# EAGLE board msi0010_new (EAGLE 6.1), part 1 of 2
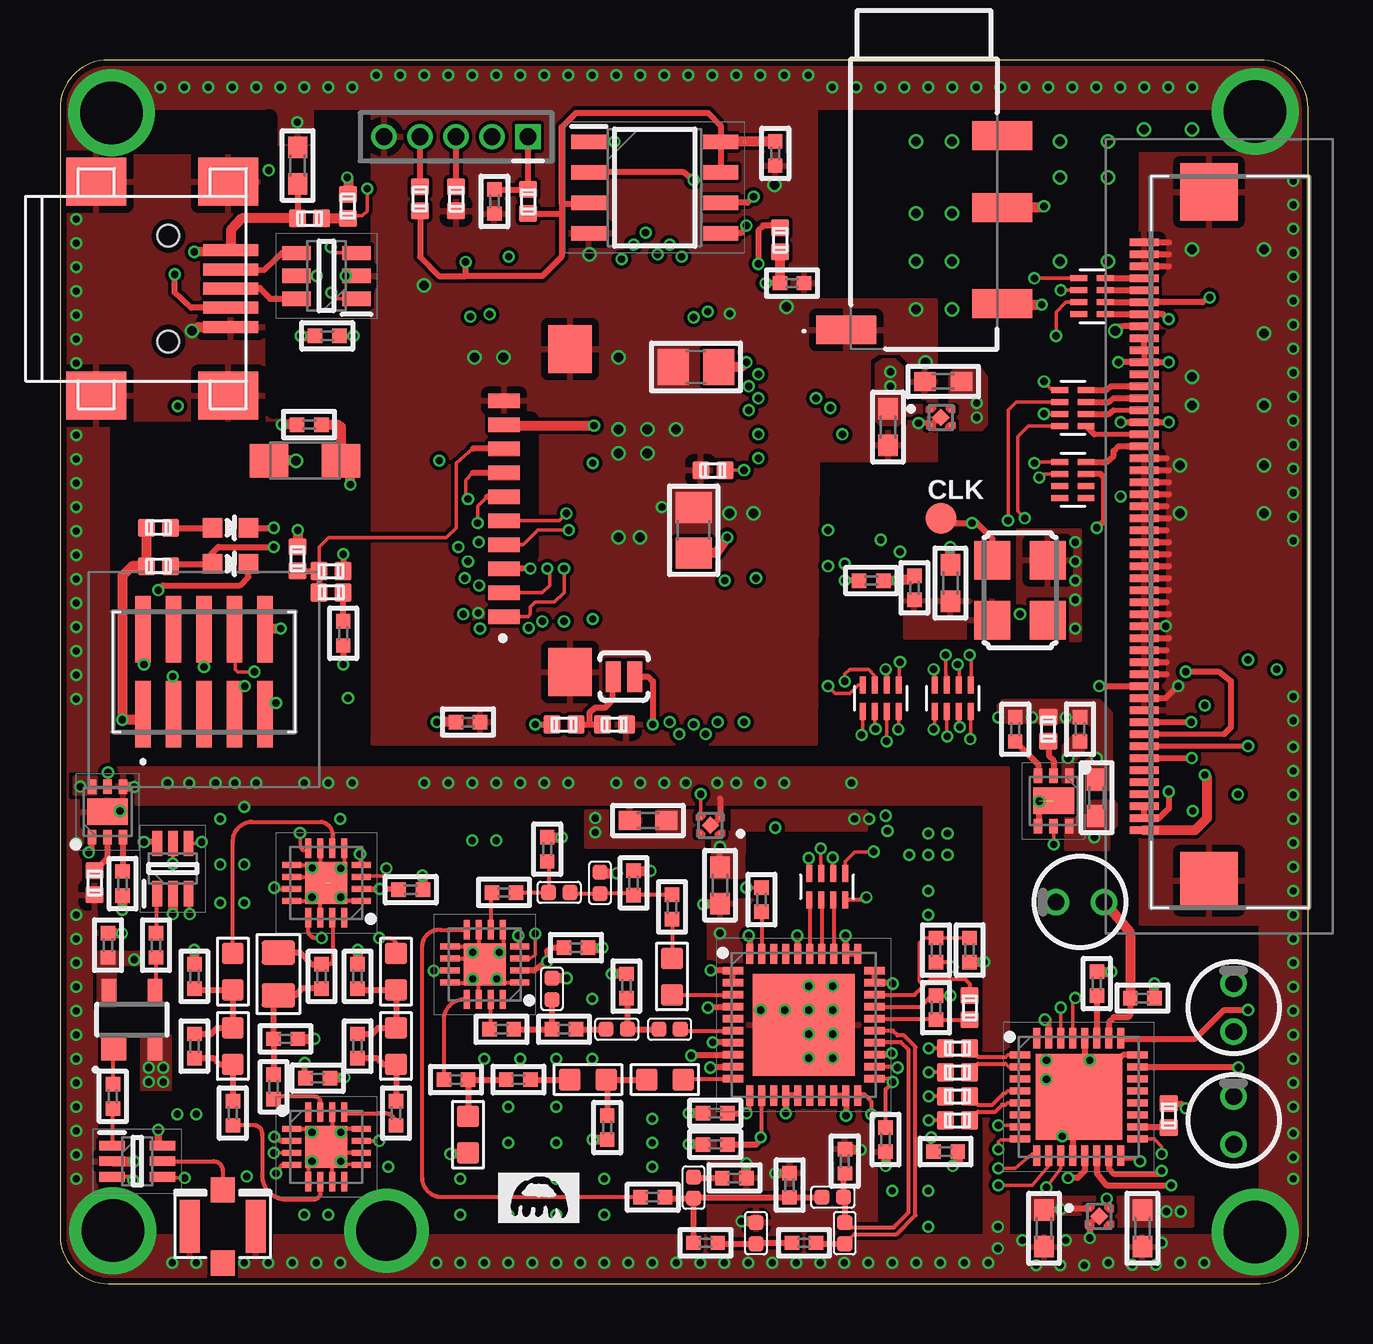
[diagram p0: board, top side]
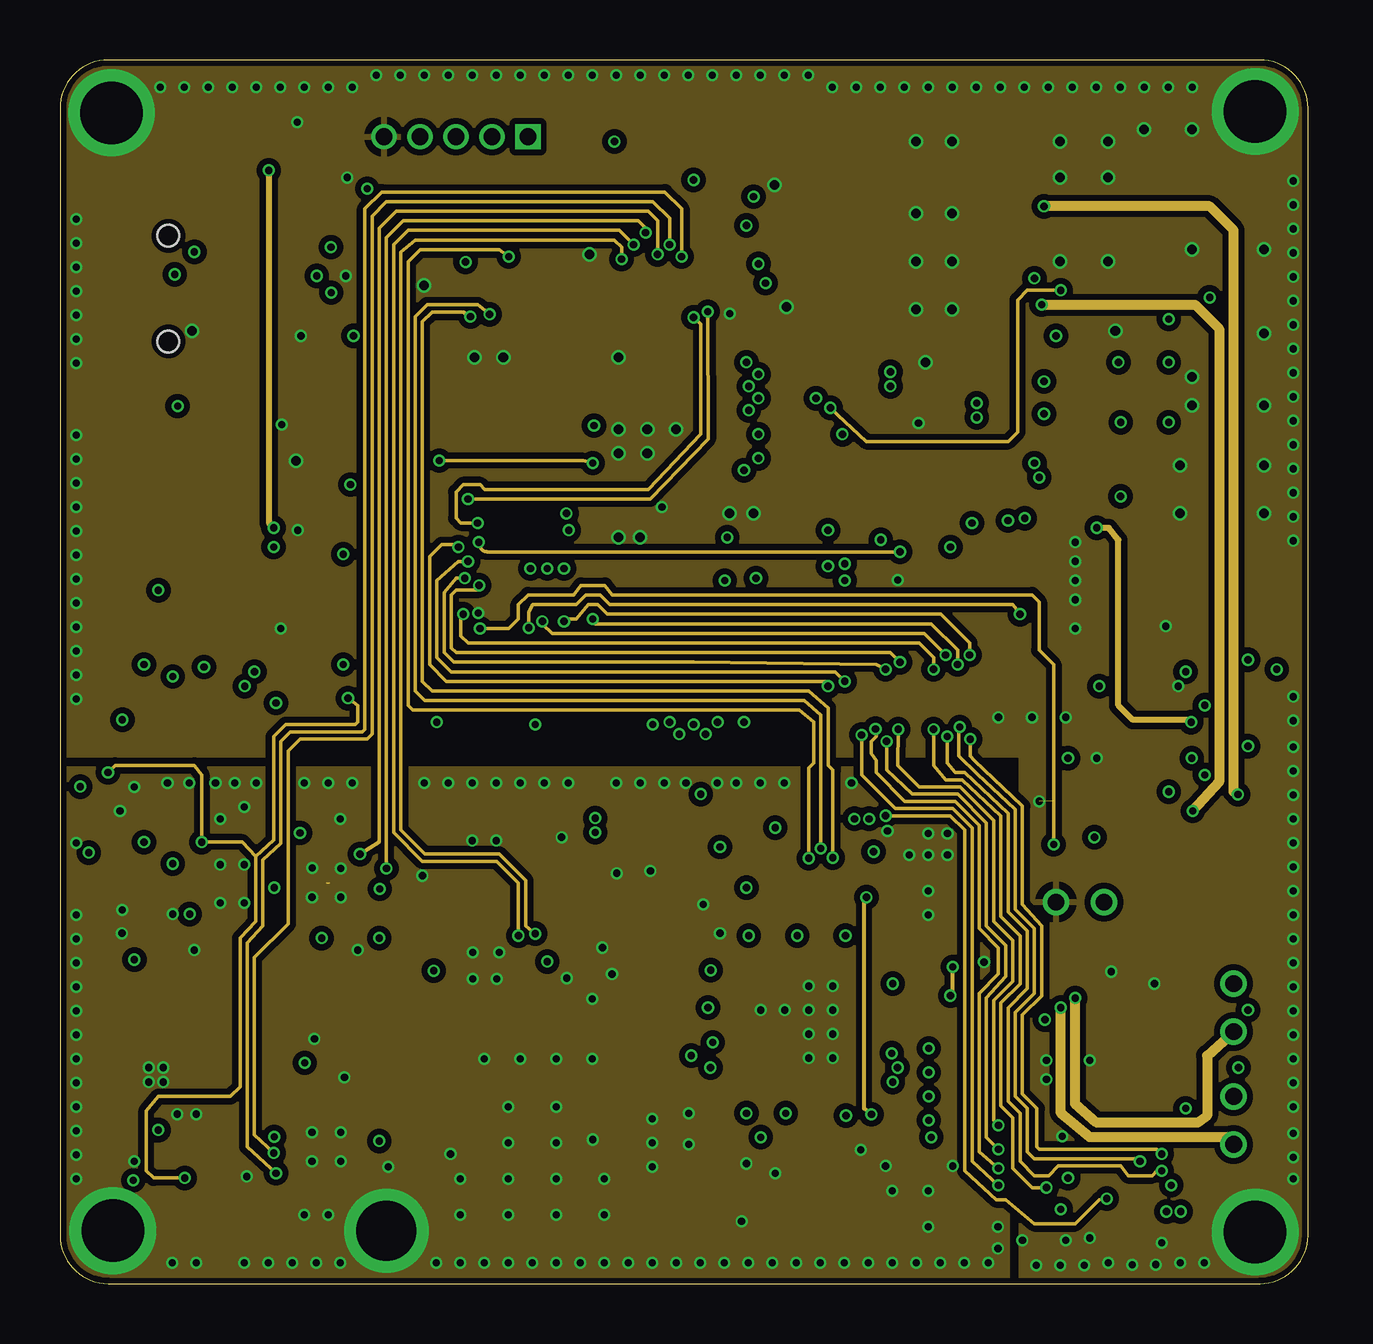
[diagram p1: board, inner layer Route2]
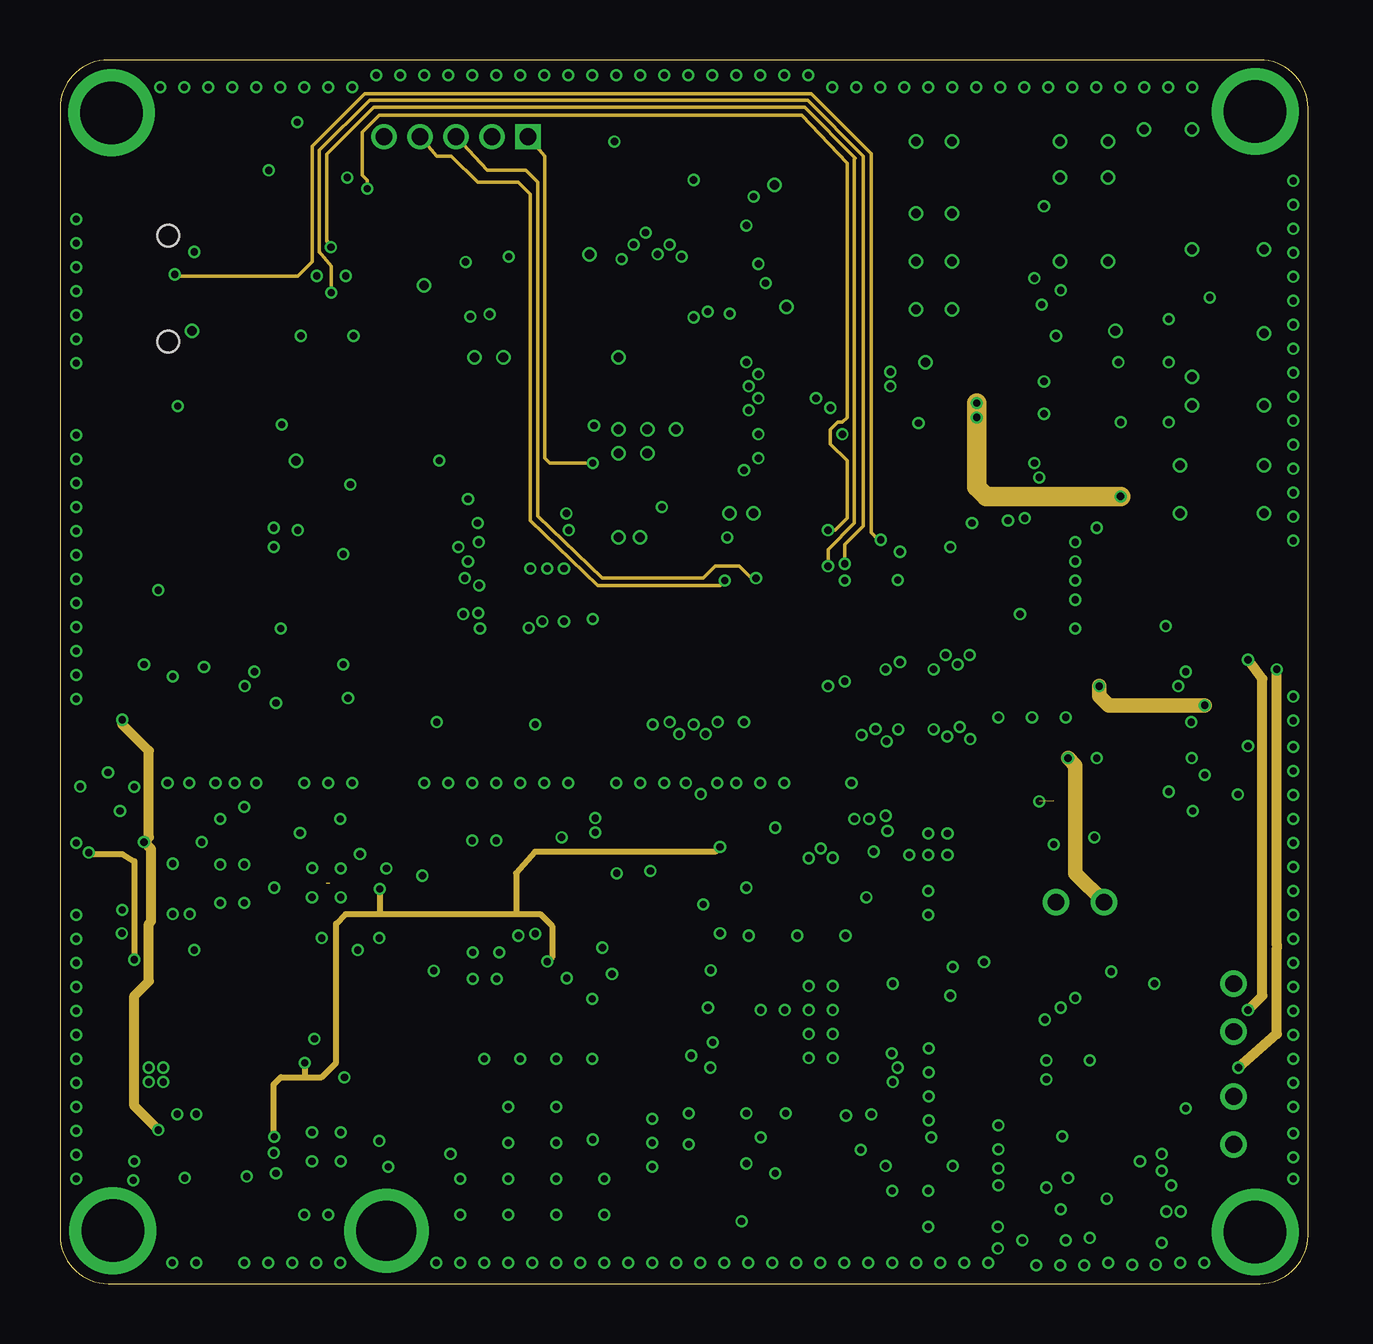
[diagram p2: board, inner layer Route3]
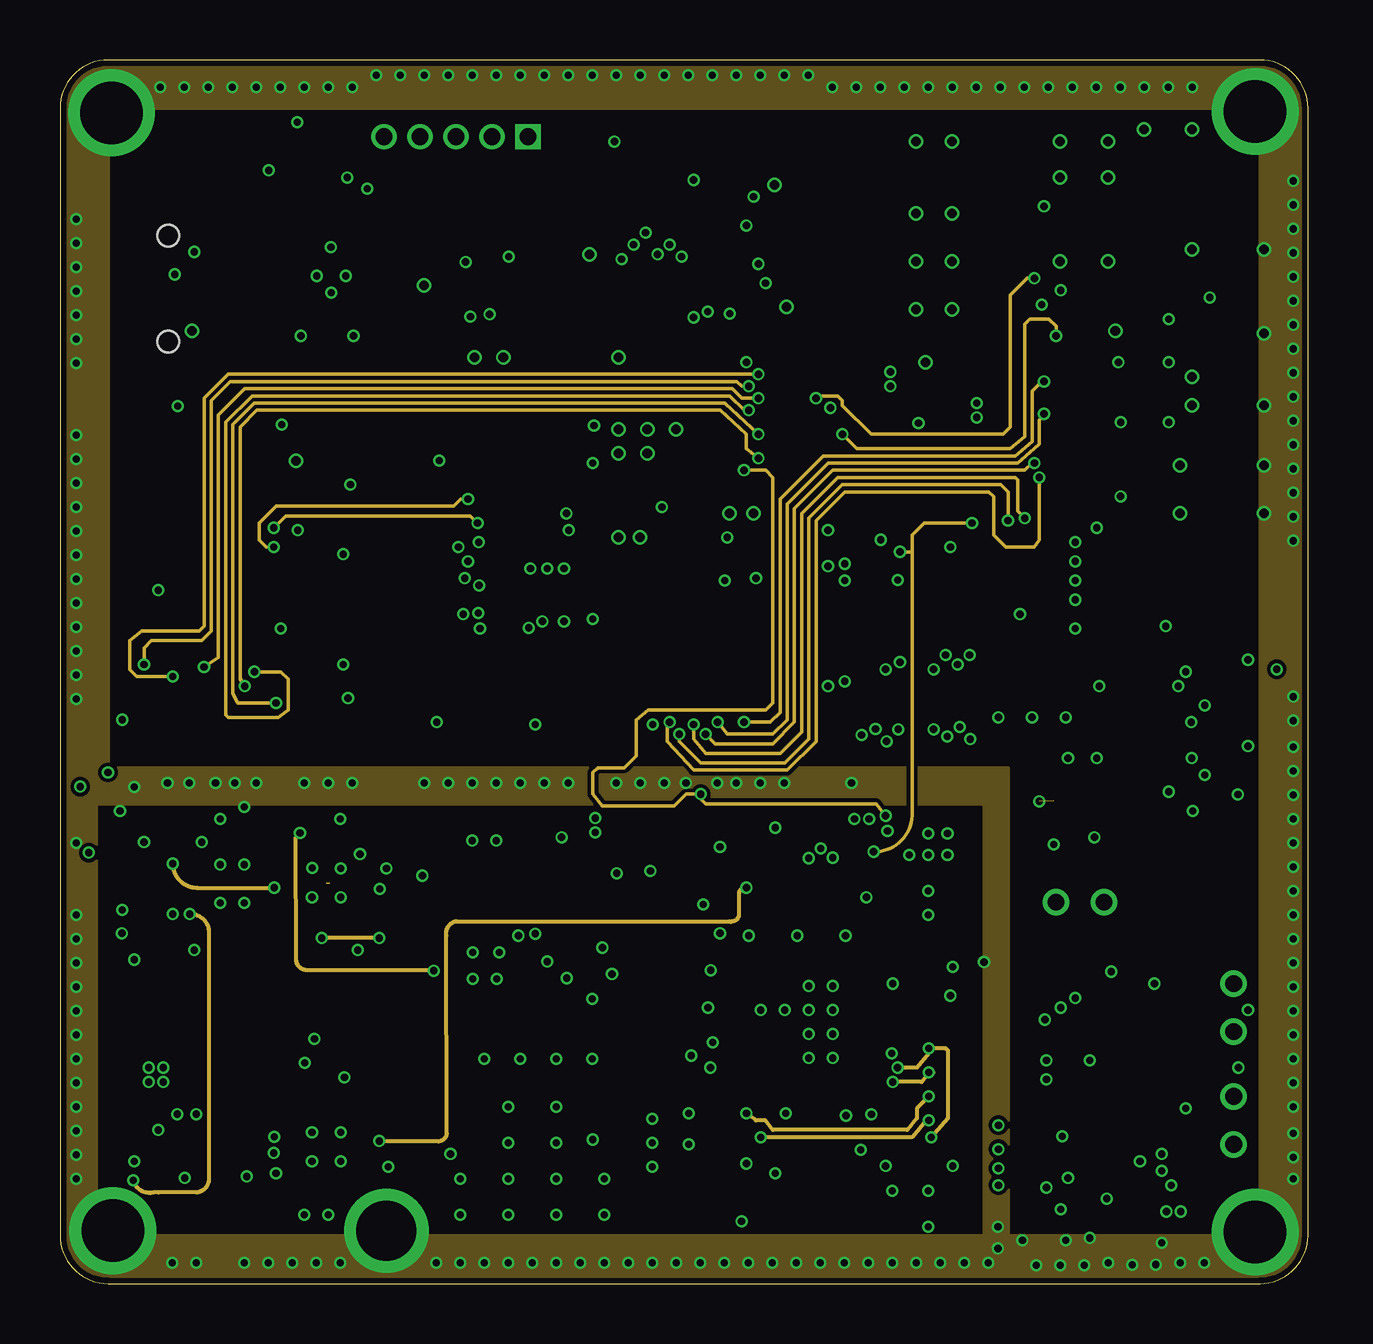
[diagram p3: board, inner layer Route14]
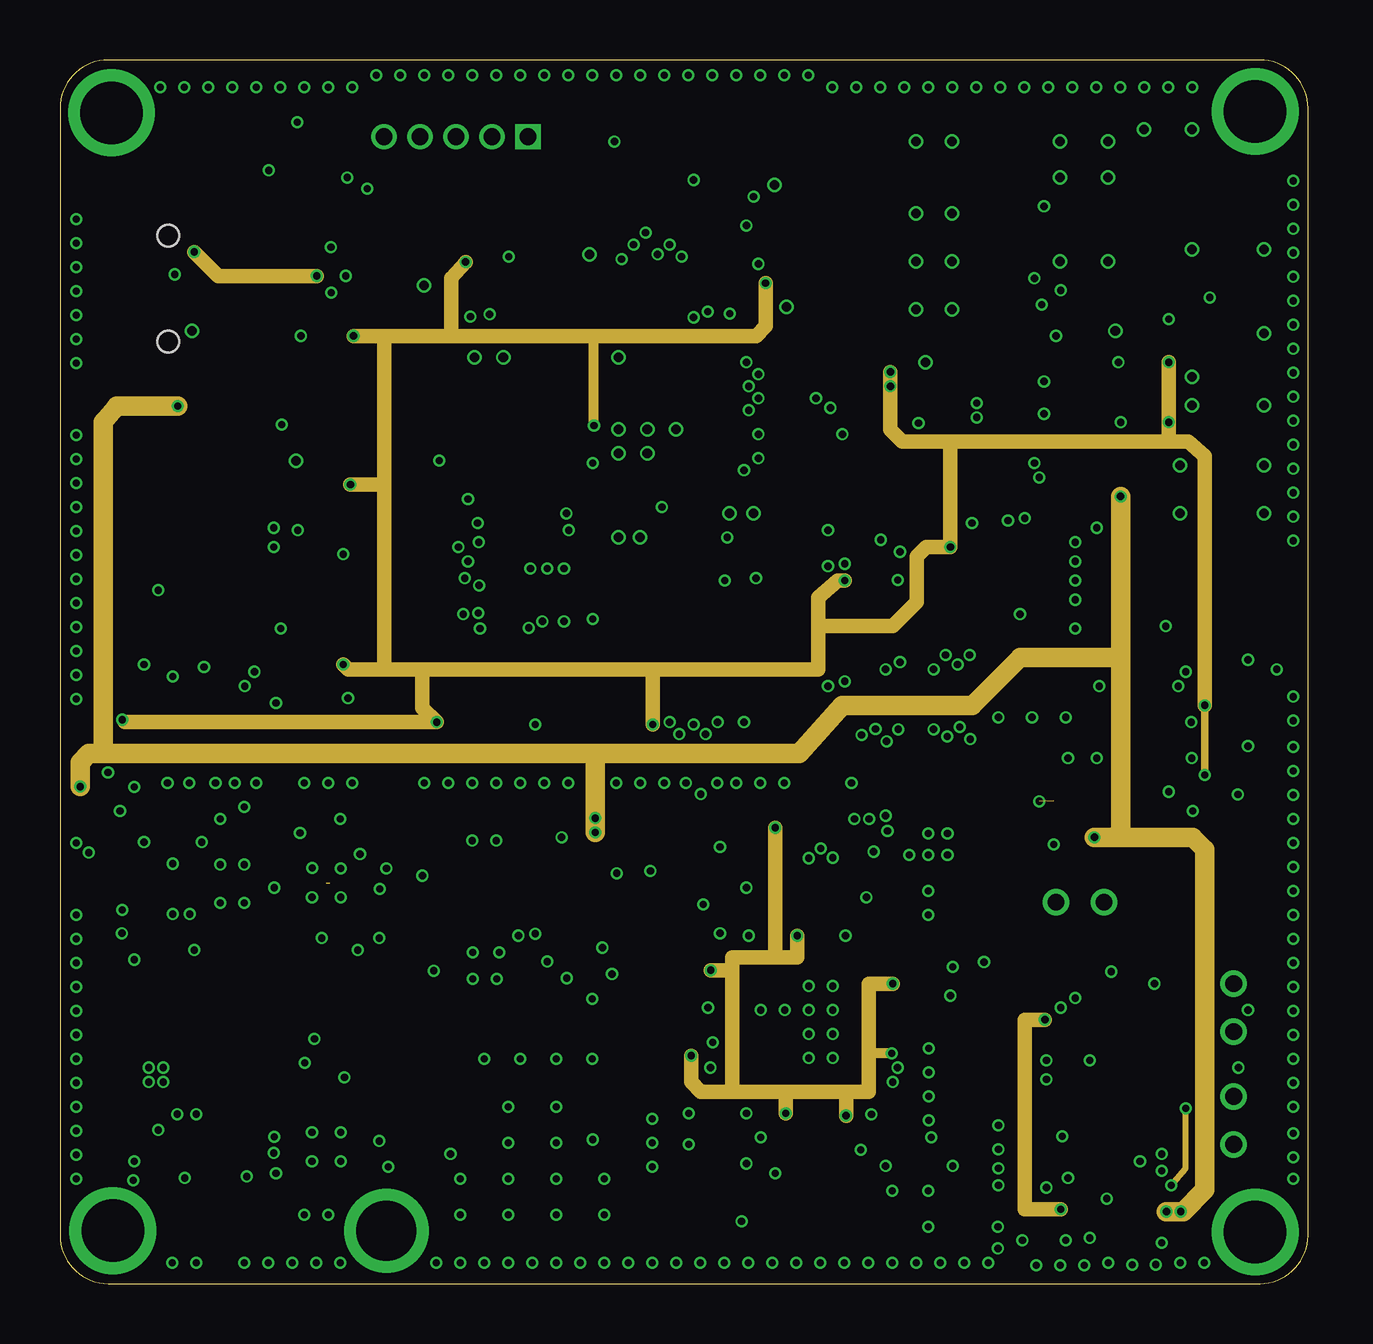
[diagram p4: board, inner layer Route15]
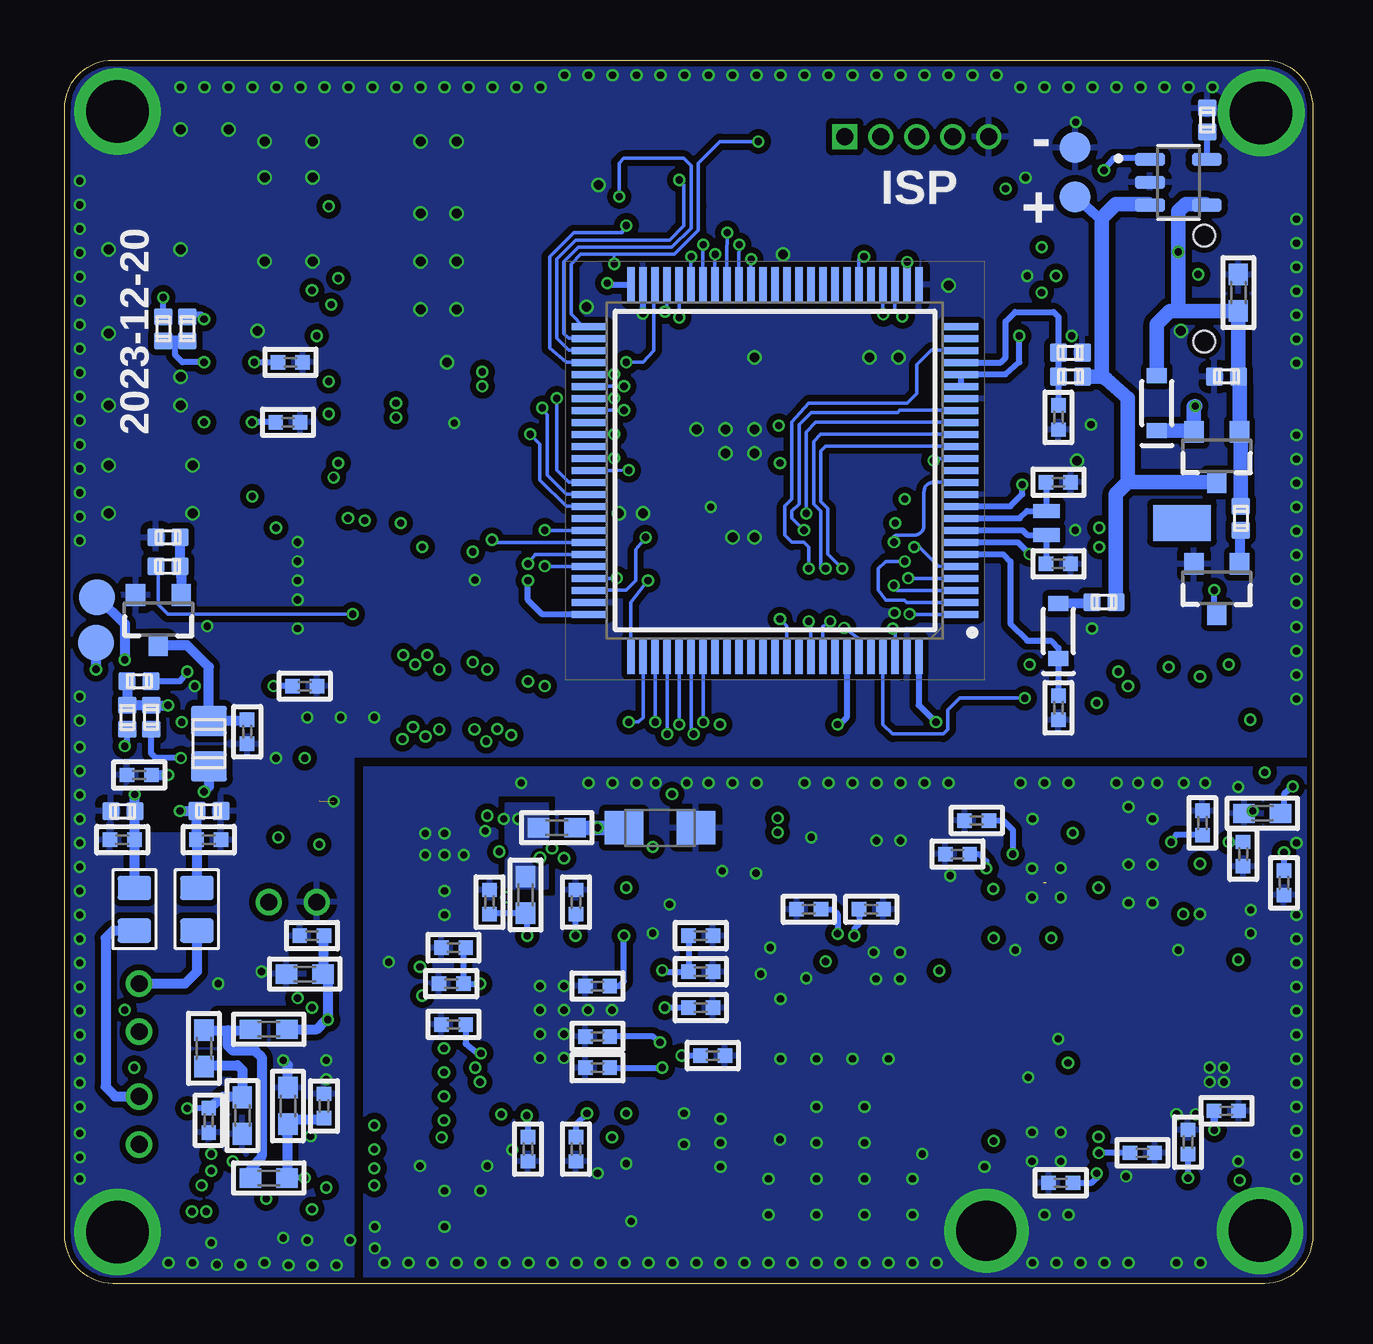
[diagram p5: board, bottom side, seen from below]

Size 52 x 51 mm. Coordinates in mm from the lower left corner, seen from the top.
Outline: 0,2 arc90 2,0 50,0 arc90 52,2 52,49 arc90 50,51 2,51 arc90 0,49 0,2
Copper layers (1*2*3*14*15*16): Top 0.035mm / dielectric 5mil / Route2 0.035mm / dielectric 0.5mm / Route3 0.035mm / dielectric 0.2mm / Route14 0.035mm / dielectric 0.5mm / Route15 0.035mm / dielectric 5mil / Bottom 0.035mm
Design rules: minimum track width 4.5mil, minimum drill 10mil, track to track 5mil, track to pad 5mil, pad to pad 5mil, via to via 5mil, smd to smd 1mil, copper to edge 10mil, drill to drill 8mil, minimum pad ring 6mil, minimum via ring 4mil, stop-mask expansion 4mil, vias tented up to drill 25mil, thermal gap 12mil
Net classes: 0 default: width 0.3 mm; 1 USB: width 0.406 mm; 2 gnd: width 0.254 mm, drill 0.584 mm, clearance 0.203 mm
tRestrict: 9 lines
bRestrict: 8 lines

## Footprints (pad centres in the part's own frame; a part is rotated, then mirrored left to right if it is on the bottom)
U.FL = smd 2.2 x 0.85: P$1 0,1.375; P$2 0,-1.375 | smd 1.05 x 1: P$3 1.525,0; P$4 -1.525,0
TP13R = smd 1.3 x 1.3: TP 0,0
_0402 = smd 0.6 x 0.6: 1 -0.508,0; 2 0.508,0
_0603 = smd 0.9 x 0.8: 1 -0.762,0; 2 0.762,0
SANYO-OSCON_A = drill 0.7 pad 1.1: + 1,0; - -1,0
SMC_A = smd 1.6 x 1.4: + -1.5,0; - 1.5,0
0805_NOTHERMALS = smd 1.3 x 1.5: 1 -0.95,0; 2 0.95,0
SOD-323 = smd 0.63 x 0.83: A 1.15,0; C -1.15,0
LED-0603 = smd 0.8 x 0.8: A 0,-0.75; C 0,0.75
SOT127P602X173-8N = smd 1.45 x 0.6: 1 -2.75,1.905; 2 -2.75,0.635; 3 -2.75,-0.635; 4 -2.75,-1.905; 5 2.75,-1.905; 6 2.75,-0.635; 7 2.75,0.635; 8 2.75,1.905
SOT95P280X145-6N = smd 1.2 x 0.6: 1 -1.25,0.95; 2 -1.25,0; 3 -1.25,-0.95; 4 1.25,-0.95; 5 1.25,0; 6 1.25,0.95
SON65P200X200X80-7N = smd 0.6 x 0.35: 1 -1.05,0.65; 2 -1.05,0; 3 -1.05,-0.65; 4 1.05,-0.65; 5 1.05,0; 6 1.05,0.65 | smd 1.1 x 1.7: 7 0,0
VREG_NCP170AMX285TCG = smd 0.1 x 0.1: 1 -0.405,0.325; 2 -0.405,-0.325; 3 0.405,-0.325; 4 0.405,0.325 | smd 0.52 x 0.52 rotated 45: 5 0,0
QFN50P500X500X80-33N = smd 0.85 x 0.3: 1 -2.45,1.75; 2 -2.45,1.25; 3 -2.45,0.75; 4 -2.45,0.25; 5 -2.45,-0.25; 6 -2.45,-0.75; 7 -2.45,-1.25; 8 -2.45,-1.75; 17 2.45,-1.75; 18 2.45,-1.25; 19 2.45,-0.75; 20 2.45,-0.25; 21 2.45,0.25; 22 2.45,0.75; 23 2.45,1.25; 24 2.45,1.75 | smd 0.3 x 0.85: 9 -1.75,-2.45; 10 -1.25,-2.45; 11 -0.75,-2.45; 12 -0.25,-2.45; 13 0.25,-2.45; 14 0.75,-2.45; 15 1.25,-2.45; 16 1.75,-2.45; 25 1.75,2.45; 26 1.25,2.45; 27 0.75,2.45; 28 0.25,2.45; 29 -0.25,2.45; 30 -0.75,2.45; 31 -1.25,2.45; 32 -1.75,2.45 | smd 3.6 x 3.6: 33 0,0
QFP50P1600X1600X160-100N = smd 1.475 x 0.3: 1 -7.738,6; 2 -7.738,5.5; 3 -7.738,5; 4 -7.738,4.5; 5 -7.738,4; 6 -7.738,3.5; 7 -7.738,3; 8 -7.738,2.5; 9 -7.738,2; 10 -7.738,1.5; 11 -7.738,1; 12 -7.738,0.5; 13 -7.738,0; 14 -7.738,-0.5; 15 -7.738,-1; 16 -7.738,-1.5; 17 -7.738,-2; 18 -7.738,-2.5; 19 -7.738,-3; 20 -7.738,-3.5; 21 -7.738,-4; 22 -7.738,-4.5; 23 -7.738,-5; 24 -7.738,-5.5; 25 -7.738,-6; 51 7.738,-6; 52 7.738,-5.5; 53 7.738,-5; 54 7.738,-4.5; 55 7.738,-4; 56 7.738,-3.5; 57 7.738,-3; 58 7.738,-2.5; 59 7.738,-2; 60 7.738,-1.5; 61 7.738,-1; 62 7.738,-0.5; 63 7.738,0; 64 7.738,0.5; 65 7.738,1; 66 7.738,1.5; 67 7.738,2; 68 7.738,2.5; 69 7.738,3; 70 7.738,3.5; 71 7.738,4; 72 7.738,4.5; 73 7.738,5; 74 7.738,5.5; 75 7.738,6 | smd 0.3 x 1.475: 26 -6,-7.738; 27 -5.5,-7.738; 28 -5,-7.738; 29 -4.5,-7.738; 30 -4,-7.738; 31 -3.5,-7.738; 32 -3,-7.738; 33 -2.5,-7.738; 34 -2,-7.738; 35 -1.5,-7.738; 36 -1,-7.738; 37 -0.5,-7.738; 38 0,-7.738; 39 0.5,-7.738; 40 1,-7.738; 41 1.5,-7.738; 42 2,-7.738; 43 2.5,-7.738; 44 3,-7.738; 45 3.5,-7.738; 46 4,-7.738; 47 4.5,-7.738; 48 5,-7.738; 49 5.5,-7.738; 50 6,-7.738; 76 6,7.738; 77 5.5,7.738; 78 5,7.738; 79 4.5,7.738; 80 4,7.738; 81 3.5,7.738; 82 3,7.738; 83 2.5,7.738; 84 2,7.738; 85 1.5,7.738; 86 1,7.738; 87 0.5,7.738; 88 0,7.738; 89 -0.5,7.738; 90 -1,7.738; 91 -1.5,7.738; 92 -2,7.738; 93 -2.5,7.738; 94 -3,7.738; 95 -3.5,7.738; 96 -4,7.738; 97 -4.5,7.738; 98 -5,7.738; 99 -5.5,7.738; 100 -6,7.738
QFN50P600X600X90-41N = smd 0.85 x 0.3: 1 -2.95,2.25; 2 -2.95,1.75; 3 -2.95,1.25; 4 -2.95,0.75; 5 -2.95,0.25; 6 -2.95,-0.25; 7 -2.95,-0.75; 8 -2.95,-1.25; 9 -2.95,-1.75; 10 -2.95,-2.25; 21 2.95,-2.25; 22 2.95,-1.75; 23 2.95,-1.25; 24 2.95,-0.75; 25 2.95,-0.25; 26 2.95,0.25; 27 2.95,0.75; 28 2.95,1.25; 29 2.95,1.75; 30 2.95,2.25 | smd 0.3 x 0.85: 11 -2.25,-2.95; 12 -1.75,-2.95; 13 -1.25,-2.95; 14 -0.75,-2.95; 15 -0.25,-2.95; 16 0.25,-2.95; 17 0.75,-2.95; 18 1.25,-2.95; 19 1.75,-2.95; 20 2.25,-2.95; 31 2.25,2.95; 32 1.75,2.95; 33 1.25,2.95; 34 0.75,2.95; 35 0.25,2.95; 36 -0.25,2.95; 37 -0.75,2.95; 38 -1.25,2.95; 39 -1.75,2.95; 40 -2.25,2.95 | smd 4.25 x 4.25: 41 0,0
4-SOT143 = smd 1.1 x 1.05: 1 -1.15,0.76 | smd 1.1 x 0.6: 2 -1.15,-0.96; 3 1.15,-0.96; 4 1.15,0.96
SOT65P210X110-6N = smd 1.05 x 0.4: 1 -1.05,0.65; 2 -1.05,0; 3 -1.05,-0.65; 4 1.05,-0.65; 5 1.05,0; 6 1.05,0.65
QFN50P300X300X80-17N = smd 0.8 x 0.25: 1 -1.45,0.75; 2 -1.45,0.25; 3 -1.45,-0.25; 4 -1.45,-0.75; 9 1.45,-0.75; 10 1.45,-0.25; 11 1.45,0.25; 12 1.45,0.75 | smd 0.25 x 0.8: 5 -0.75,-1.45; 6 -0.25,-1.45; 7 0.25,-1.45; 8 0.75,-1.45; 13 0.75,1.45; 14 0.25,1.45; 15 -0.25,1.45; 16 -0.75,1.45 | smd 1.75 x 1.75: 17 0,0
SOT95P280X100-5N = smd 1.24 x 0.55: 1 -1.185,0.95; 2 -1.185,0; 3 -1.185,-0.95; 4 1.185,-0.95; 5 1.185,0.95
3220-10-0300-00-TR_322010030000TR = smd 0.65 x 2.77: 1 -2.54,-1.765; 2 -2.54,1.765; 3 -1.27,-1.765; 4 -1.27,1.765; 5 0,-1.765; 6 0,1.765; 7 1.27,-1.765; 8 1.27,1.765; 9 2.54,-1.765; 10 2.54,1.765
62684502100ALF = smd 0.3 x 1.2: 1 -12,3.425; 2 -11.5,3.425; 3 -11,3.425; 4 -10.5,3.425; 5 -10,3.425; 6 -9.5,3.425; 7 -9,3.425; 8 -8.5,3.425; 9 -8,3.425; 10 -7.5,3.425; 11 -7,3.425; 12 -6.5,3.425; 13 -6,3.425; 14 -5.5,3.425; 15 -5,3.425; 16 -4.5,3.425; 17 -4,3.425; 18 -3.5,3.425; 19 -3,3.425; 20 -2.5,3.425; 21 -2,3.425; 22 -1.5,3.425; 23 -1,3.425; 24 -0.5,3.425; 25 0,3.425; 26 0.5,3.425; 27 1,3.425; 28 1.5,3.425; 29 2,3.425; 30 2.5,3.425; 31 3,3.425; 32 3.5,3.425; 33 4,3.425; 34 4.5,3.425; 35 5,3.425; 36 5.5,3.425; 37 6,3.425; 38 6.5,3.425; 39 7,3.425; 40 7.5,3.425; 41 8,3.425; 42 8.5,3.425; 43 9,3.425; 44 9.5,3.425; 45 10,3.425; 46 10.5,3.425; 47 11,3.425; 48 11.5,3.425; 49 12,3.425; 50 12.5,3.425 | smd 2.4 x 2.4: 51 -14.1,0.725; 52 14.6,0.725
PRT12639 = smd 1.2 x 2.5: 1 6.25,-3.25; 2 5.15,3.25; 3 1.15,3.25; 4 -1.85,3.25
686120148922_686120148922 = smd 0.6 x 1.3: 1 -9.5,2.9; 2 -8.5,2.9; 3 -7.5,2.9; 4 -6.5,2.9; 5 -5.5,2.9; 6 -4.5,2.9; 7 -3.5,2.9; 8 -2.5,2.9; 9 -1.5,2.9; 10 -0.5,2.9 | smd 2 x 1.8: MP1 -11.8,0.15; MP2 1.64,0.15
L0805@1 = smd 1.016 x 1.397: 1 -0.889,0; 2 0.889,0
L0603@1 = smd 0.889 x 0.889: 1 -0.762,0; 2 0.762,0
L0402@1 = smd 0.635 x 0.635: 1 -0.445,0; 2 0.445,0
SPARKFUN-CONNECTORS_PIC-ICSP-MINI = drill 0.7 square: 1 -3,0 | drill 0.7: 2 -1.5,0; 3 0,0; 4 1.5,0; 5 3,0
ASF = smd 1.6 x 1.5: 1 -1.25,-1.15; 2 1.25,-1.15; 3 1.25,1.15; 4 -1.25,1.15
SOT23-3 = smd 0.8 x 0.9: 1 -0.95,-1; 2 0.95,-1; 3 0,1.1
SOT23-3@1 = smd 0.8 x 0.9: 1 -0.95,-1; 2 0.95,-1; 3 0,1.1
C0402 = smd 0.75 x 0.7: 1 0,0.5; 2 0,-0.5
R_MATRIX_4_0402 = smd 0.25 x 0.7: 1.1 -0.75,-0.55; 1.2 -0.75,0.55; 2.1 -0.25,-0.55; 2.2 -0.25,0.55; 3.1 0.25,-0.55; 3.2 0.25,0.55; 4.1 0.75,-0.55; 4.2 0.75,0.55
C0805 = smd 1.5 x 1.25: 1 0,0.95; 2 0,-0.95
SJ_2S-NO = smd 0.635 x 1.27: 1 -0.45,0; 2 0.45,0
TP15R = smd 1.5 x 1.5: TP 0,0
MINI-USB-B5 = smd 2.3 x 0.5: 1 8.55,6.6; 2 8.55,5.8; 3 8.55,5; 4 8.55,4.2; 5 8.55,3.4 | smd 2.5 x 2: M1 2.95,9.45; M2 8.45,9.45; M3 2.95,0.55; M4 8.45,0.55 | hole 0.9: 5.95,2.8; 5.95,7.2
CRYSTAL-32KHZ-MS3V = smd 0.6 x 1.1: P$1 -0.5,-2; P$2 0.5,-2 | smd 1.5 x 2.4: P$3 0,3.65

## Placement (x,y rotation side)
A1  U.FL  [U.FL]  6.78,2.38 90 top
BATT  TPSTP13R  [TP13R]  9.9,45.3 0 bottom
BATT1  TPSTP13R  [TP13R]  9.9,47.35 0 bottom
C1  100n  [_0402]  29.8,47.1 90 top
C2  100n  [_0402]  42.6,38.4 180 bottom
C3  1uF  [_0603]  9.9,46.6 90 top
C4  100n  [_0402]  1.2,16.7 270 bottom
C5  1uF  [_0603]  2.1,19.6 180 bottom
C6  100n  [_0402]  42.7,35.9 0 bottom
C7  1n  [_0402]  2.61,16.67 270 top
C8  1uF  [_0603]  36.8,37.6 180 top
C9  100n  [_0402]  11.8,27.1 90 top
C10  100n  [_0402]  35.6,29 90 top
C11  47n  [_0402]  49.61,18.5 180 bottom
C12  47n  [_0402]  46,18.5 180 bottom
C13  1uF  [_0603]  45.1,2.3 270 top
C14  100n  [_0402]  42,24.9 0 bottom
C15  100n  [_0402]  42.5,23.1 90 top
C16  1uF  [_0603]  43.19,20.25 90 top
C17  100n  [_0402]  44.4,23 90 bottom
C18  100n  [_0402]  48.9,21.2 0 bottom
C19  220uF  [SANYO-OSCON_A]  48.9,6.8 270 top
C20  220uF  [SANYO-OSCON_A]  48.9,11.5 270 top
C21  1n  [_0402]  39.8,23.1 90 top
C22  1uF  [_0603]  24.5,19.3 180 top
C23  1uF  [_0603]  34.5,35.7 90 top
C24  10uF  [_0402]  43.2,12.5 90 top
C25  1uF  [_0603]  41,2.3 90 top
C26  100n  [_0603]  42,12.9 0 bottom
C27  10uF  [_0402]  41.7,14.5 0 bottom
C28  220uF  [SANYO-OSCON_A]  42.5,15.9 0 top
C29  100n  [_0402]  45.1,11.9 180 top
C30  10uF  [SMC_A]  10.2,34.3 180 top
C31  100n  [_0402]  17,23.4 180 top
C32  100n  [_0402]  35.8,14 180 bottom
C33  1uF  [_0603]  27.5,16.6 90 top
C34  100n  [_0402]  29.8,12.4 180 bottom
C35  47uF  [SMC_A]  27.2,19 0 bottom
C36  100n  [_0402]  18.1,45.1 270 top
C37  100n  [_0402]  11.14,39.5 0 top
C38  2.2uF  [0805_NOTHERMALS]  26.4,31.4 90 top
C39  100n  [_0402]  34.3,15.9 90 bottom
C40  10n  [_0402]  37.9,13.9 270 top
C41  1n  [_0402]  30.7,5.6 270 bottom
C42  100n  [_0402]  25.5,11.5 180 bottom
C43  1n  [_0402]  32.7,5.6 90 bottom
C44  6n8  [_0402]  36.5,13.9 90 top
C45  6n8  [_0402]  36.5,11.5 90 top
C46  100n  [_0402]  35.9,12.5 180 bottom
C47  100n  [_0402]  25.5,14.5 0 bottom
C48  10  [_0402]  10.6,30 180 bottom
C49  10  [_0402]  10.6,33.4 180 bottom
C50  100n  [_0402]  25,9.5 0 bottom
C51  100n  [_0402]  35.8,10.8 180 bottom
C52  100n  [_0402]  33.8,29.3 180 top
C53  100n  [_0402]  41.2,7.4 90 bottom
C54  10uF  [_0603]  42.7,7.4 90 bottom
C55  10uF  [_0402]  46,6.8 270 bottom
C56  100n  [_0603]  44.6,7 270 bottom
C57  100n  [_0402]  29.8,10.3 180 bottom
C58  100n  [_0402]  29.8,9 180 bottom
C59  10n  [_0402]  36.9,5.5 180 top
C60  10n  [_0402]  34.4,6 270 top
C61  10uF  [_0402]  10.6,24 90 bottom
C62  100n  [_0402]  25.5,13 180 bottom
C63  100n  [_0402]  30.7,15.9 270 bottom
C64  10n  [_0402]  27.3,5.8 180 top
C65  10n  [_0402]  27.3,7.1 180 top
C66  2.2uF  [0805_NOTHERMALS]  26.5,38.2 180 top
C67  100n  [_0402]  10.38,35.8 0 top
C68  100n  [_0402]  30.5,41.7 0 top
C69  100n  [_0402]  2,14.1 90 top
C70  100n  [_0402]  4.6,19.2 90 bottom
C71  100n  [_0402]  4,14.1 270 top
C72  100n  [_0402]  2.2,7.8 270 top
C73  100n  [_0402]  5.2,5.9 90 bottom
C74  39  [_0402]  19.1,8.5 180 top
C75  10n  [_0402]  16.5,8.5 180 top
C76  1.8  [_0402]  22.8,6.5 90 top
C77  2.2  [_0402]  31,1.7 180 top
C78  1.8  [_0402]  26.9,1.7 180 top
C79  4.7  [_0402]  24.7,3.6 180 top
C80  4.7  [_0402]  21,10.6 180 top
C81  10n  [_0402]  18.4,10.6 180 top
C82  2.7  [_0402]  23.6,12.4 270 top
C83  27  [_0402]  28.1,4.4 180 top
C84  1.8  [_0402]  32.7,5.1 90 top
C85  27  [_0402]  30.4,4.1 90 top
C86  10  [_0402]  25.5,15.7 90 top
C87  10  [_0402]  18.5,16.3 0 top
C88  1.5  [_0402]  20.3,18.1 270 top
C89  22  [_0402]  23.9,16.7 270 top
C90  3.3  [_0402]  10.9,12.8 270 top
C91  100n  [_0402]  8.9,8.2 270 top
C92  120  [_0402]  9.4,10.2 180 top
C93  3.9  [_0402]  12.4,9.9 270 top
C94  39  [_0402]  14,7.1 270 top
C95  39  [_0402]  12.4,12.8 270 top
C96  100n  [_0402]  29.23,16 90 top
C97  100n  [_0402]  14.61,16.42 0 top
C98  100n  [_0402]  10.74,8.56 0 top
C99  100n  [_0402]  21.5,14 0 top
C100  100n  [_0402]  7.1,5.45 180 bottom
C101  100n  [_0402]  21,15.6 0 bottom
C102  100n  [_0402]  10.5,4.2 0 bottom
C103  100n  [_0402]  14.8,17.9 0 bottom
C104  2.7  [_0402]  5.6,9.9 270 top
C105  180  [_0402]  7.2,7.1 270 top
C106  100n  [_0402]  18.4,15.6 0 bottom
C107  82  [_0402]  5.6,12.8 270 top
C108  100n  [_0402]  14,19.3 180 bottom
C109  1uF  [_0603]  3.1,41.3 270 bottom
C110  100n  [_0402]  10.6,36.1 90 bottom
C111  100n  [_0402]  3.6,7.2 0 bottom
C112  100n  [_0402]  2.9,17.9 270 bottom
CLK  TPSTP13R  [TP13R]  36.7,31.9 0 top
D1  1A/40V/500mV  [SOD-323]  10.6,27.2 90 bottom
D2  1 led  [LED-0603]  7.1,31.5 270 top
D3  1 led  [LED-0603]  7.1,30 270 top
D4  1A/40V/500mV  [SOD-323]  6.5,36.7 90 bottom
FB1  FERITTE  [_0603]  37.1,29.2 90 top
FB2  FERITTE  [_0603]  43.5,10.6 0 bottom
FB3  FERITTE  [_0603]  32.8,16.2 270 bottom
FB4  FERITTE  [_0603]  31.5,19 0 bottom
FB5  FERITTE  [_0603]  43.5,4.4 0 bottom
FB6  FERITTE  [_0603]  46.2,9.8 90 bottom
IC1  FM25W256-GTR  [SOT127P602X173-8N]  24.78,45.68 0 top
IC2  USBLC6-2SC6  [SOT95P280X145-6N]  11.1,42 180 top
IC3  TPS22810DRVT  [SON65P200X200X80-7N]  1.98,19.66 90 top
IC4  NCV8161AMX330TBG  [VREG_NCP170AMX285TCG]  36.7,36.1 0 top
IC5  TPS22810DRVT  [SON65P200X200X80-7N]  41.4,20.12 270 top
IC6  NCV8161AMX330TBG  [VREG_NCP170AMX285TCG]  43.3,2.8 0 top
IC7  NCV8161AMX330TBG  [VREG_NCP170AMX285TCG]  27.1,19.1 180 top
IC8  NAU8822LYG  [QFN50P500X500X80-33N]  42.45,7.78 0 top
IC9  STM32H743VIT6  [QFP50P1600X1600X160-100N]  22.41,33.89 180 bottom
IC10  MSI001  [QFN50P600X600X90-41N]  30.99,10.79 0 top
IC11  MAX2650EUS+T  [4-SOT143]  3,11 90 top
IC12  PE4259  [SOT65P210X110-6N]  3.22,5.1 0 top
IC13  PE4259  [SOT65P210X110-6N]  4.7,17.3 90 top
IC14  PE42641MLBD-Z  [QFN50P300X300X80-17N]  17.7,13.3 180 top
IC15  PE42641MLBD-Z  [QFN50P300X300X80-17N]  11.1,16.7 180 top
IC16  PE42641MLBD-Z  [QFN50P300X300X80-17N]  11.1,5.7 0 top
IC17  LTC4054LES5-4.2  [SOT95P280X100-5N]  5.6,45.9 0 bottom
J1  J20  [3220-10-0300-00-TR_322010030000TR]  6,25.5 0 top
J2  62684-502100ALF  [62684502100ALF]  48.6,30.9 90 top
J3  PRT-12639  [PRT12639]  36,46 270 top
J4  J10  [686120148922_686120148922]  21.4,37.3 90 top
L1  10uH  [L0805@1]  49.1,15.6 90 bottom
L2  10uH  [L0805@1]  46.5,15.6 90 bottom
L3  68nH  [L0603@1]  25.2,8.5 180 top
L4  100nH  [L0603@1]  22,8.5 180 top
L5  270nH  [L0603@1]  17,6.2 90 top
L6  6.8nH  [L0402@1]  29,2.1 90 top
L7  22nH  [L0402@1]  26.4,4 90 top
L8  8.2nH  [L0402@1]  32.7,2.1 90 top
L9  15nH  [L0402@1]  25.4,10.6 180 top
L10  27nH  [L0402@1]  23.2,10.6 180 top
L11  6.8nH  [L0402@1]  32.2,3.6 0 top
L12  47nH  [L0402@1]  20.5,12.28 270 top
L13  82nH  [L0603@1]  25.5,12.8 90 top
L14  100nH  [L0402@1]  20.8,16.3 0 top
L15  1uF  [L0805@1]  9.1,12.9 90 top
L16  39nH  [L0402@1]  22.5,16.7 270 top
L17  330nF  [L0603@1]  14,9.9 90 top
L18  220nH  [L0603@1]  14,13 90 top
L19  470nH  [L0603@1]  7.2,9.9 90 top
L20  330nH  [L0603@1]  7.2,13 90 top
PR  ISP  [SPARKFUN-CONNECTORS_PIC-ICSP-MINI]  16.5,47.8 180 top
Q1  ASFL  [ASF]  40,28.9 90 top
Q2  BSS138  [SOT23-3]  48.1,27.7 180 bottom
Q3  1.1A/60V/600mΩ  [SOT23-3@1]  4,34.5 180 bottom
Q4  BSS138  [SOT23-3]  4,29 180 bottom
R1  4.7k  [C0402]  10.4,44.4 90 top
R2  10k  [C0402]  12,44.9 180 top
R3  10k  [C0402]  15,45.2 180 top
R4  10k  [C0402]  16.5,45.2 0 top
R5  22  [R_MATRIX_4_0402]  43,41.15 270 top
R6  22  [R_MATRIX_4_0402]  42.2,33.5 270 top
R7  22  [R_MATRIX_4_0402]  42.2,36.5 270 top
R8  470  [C0402]  1.44,16.7 0 top
R9  100  [C0402]  11.3,28.8 270 top
R10  330  [C0402]  11.3,29.7 90 top
R11  47k  [C0402]  49.58,19.69 90 bottom
R12  47k  [C0402]  46,19.7 90 bottom
R13  220k  [C0402]  9.9,30.2 180 top
R14  4.7k  [C0402]  48.9,25.1 270 bottom
R15  4.7k  [C0402]  49.4,23.6 0 bottom
R16  4.7k  [C0402]  48.4,23.6 180 bottom
R17  10  [C0805]  46,22.5 0 bottom
R18  470  [C0402]  41.18,23.1 180 top
R19  150k  [C0402]  47.7,31.1 270 bottom
R20  4.7k  [C0402]  47.7,29.9 90 bottom
R21  10k  [C0402]  27.2,33.9 90 top
R22  470  [C0402]  21,23.3 90 top
R23  22  [R_MATRIX_4_0402]  31.96,16.54 180 top
R24  10k  [C0402]  23.1,23.3 90 top
R25  10k  [C0402]  19.5,45.1 0 top
R26  390  [C0402]  37.9,11.5 0 top
R27  22  [R_MATRIX_4_0402]  34.2,24.4 180 top
R28  47k  [C0402]  46.2,7 0 top
R29  470  [C0402]  37.4,9.8 90 top
R30  470  [C0402]  37.4,8.8 90 top
R31  470  [C0402]  37.4,6.8 90 top
R32  22  [R_MATRIX_4_0402]  37.2,24.4 0 top
R33  470  [C0402]  37.4,7.8 90 top
R34  100  [C0402]  8.7,28.4 270 bottom
R35  470  [C0402]  4.1,31.5 270 top
R36  1.65k  [C0402]  4.4,48.5 180 bottom
R37  470  [C0402]  4.1,29.9 270 top
R38  10k  [C0402]  3,31.9 0 bottom
R39  10k  [C0402]  3.6,37.8 270 bottom
R40  10k  [C0402]  10.1,37.8 270 bottom
R41  10k  [C0402]  10.1,38.8 90 bottom
R42  10k  [C0402]  30,43.5 0 top
R43  10k  [C0402]  47.9,39.8 0 bottom
R44  10k  [C0402]  46.9,39.8 0 bottom
S1  [SJ_2S-NO]  23.5,25.3 0 top
SP  TPSTP15R  [TP15R]  50.7,26.7 0 bottom
SP1  TPSTP15R  [TP15R]  50.65,28.61 0 bottom
USB  MINI-USB  [MINI-USB-B5]  -1.43,36.47 0 top
Y1  32KHz  [CRYSTAL-32KHZ-MS3V]  9.1,31.7 270 bottom

## Library data of the parts
A1 = SparkFun_ESP8266_Thing; PROD_ID: CONN-09193
BATT BATT1 CLK SP SP1 = testpad
C1-C18 C21-C27 C29 C31-C34 C36-C112 FB1-FB6 = microbuilder
C19 C20 C28 C30 C35 = rcl
D1 D4 = SparkFun-DiscreteSemi; PROD_ID: DIO-11623
D2 D3 S1 = SparkFun
IC1 = FM25W256-GTR; ARROW_PART_NUMBER: FM25W256-GTR; ARROW_PRICE-STOCK: https://www.arrow.com/en/products/fm25w256-gtr/cypress-semiconductor?region=nac; DESCRIPTION: CYPRESS SEMICONDUCTOR - FM25W256-GTR - F-RAM, NON-VOL, 256KBIT, 20MHZ, SOIC-8; HEIGHT: 1.727mm; MANUFACTURER_NAME: Cypress Semiconductor; MANUFACTURER_PART_NUMBER: FM25W256-GTR; MOUSER_PART_NUMBER: 877-FM25W256-GTR; MOUSER_PRICE-STOCK: https://www.mouser.co.uk/ProductDetail/Cypress-Semiconductor/FM25W256-GTR?qs=pA5MXup5wxGoDW6i2AFyWw%3D%3D
IC2 = SamacSys_Parts; ARROW_PART_NUMBER: USBLC6-2SC6; ARROW_PRICE-STOCK: https://www.arrow.com/en/products/usblc6-2sc6/stmicroelectronics; DESCRIPTION: TVS Diode Array Uni-Directional USBLC6-2SC6 17V, SOT-23 6-Pin; HEIGHT: 1.45mm; MANUFACTURER_NAME: STMicroelectronics; MANUFACTURER_PART_NUMBER: USBLC6-2SC6; MOUSER_PART_NUMBER: 511-USBLC6-2SC6; MOUSER_PRICE-STOCK: https://www.mouser.co.uk/ProductDetail/STMicroelectronics/USBLC6-2SC6/?qs=po45yt2pPpu%2FhNIlwQdTlg%3D%3D
IC3 IC5 = TPS22810DRVT; ARROW_PART_NUMBER: TPS22810DRVT; ARROW_PRICE-STOCK: https://www.arrow.com/en/products/tps22810drvt/texas-instruments?region=nac; DESCRIPTION: 18V, 3A, 79m load switch with adjustable rise time, adj. quick output discharge, & thermal shutdown; HEIGHT: 0.8mm; MANUFACTURER_NAME: Texas Instruments; MANUFACTURER_PART_NUMBER: TPS22810DRVT; MOUSER_PART_NUMBER: 595-TPS22810DRVT; MOUSER_PRICE-STOCK: https://www.mouser.co.uk/ProductDetail/Texas-Instruments/TPS22810DRVT?qs=5aG0NVq1C4wtEcND0E9Qlg%3D%3D
IC4 IC6 IC7 = NCP170AMX285TCG; MANUFACTURER: ON Semiconductor; MAXIMUM_PACKAGE_HEIGHT: 0.43 mm; PARTREV: A; STANDARD: Manufacturer Recommendations
IC8 = NAU8822LYG; ARROW_PART_NUMBER: NAU8822LYG; ARROW_PRICE-STOCK: https://www.arrow.com/en/products/nau8822lyg/nuvoton-technology; DESCRIPTION: IC AUDIO CODEC STEREO 32QFN; HEIGHT: 0.8mm; MANUFACTURER_NAME: Nuvoton; MANUFACTURER_PART_NUMBER: NAU8822LYG
IC9 = STM32H743VIT6; ARROW_PART_NUMBER: STM32H743VIT6; ARROW_PRICE-STOCK: https://www.arrow.com/en/products/stm32h743vit6/stmicroelectronics?region=nac; DESCRIPTION: ARM Microcontrollers - MCU High-performance and DSP with DP-FPU, ARM Cortex-M7 MCU with 2MBytes Flash, 1MB RAM, 400 MHz CPU, Art Accelerator, L1 cache, external memory interface, large set of peripherals; HEIGHT: 1.6mm; MANUFACTURER_NAME: STMicroelectronics; MANUFACTURER_PART_NUMBER: STM32H743VIT6; MOUSER_PART_NUMBER: 511-STM32H743VIT6; MOUSER_PRICE-STOCK: https://www.mouser.co.uk/ProductDetail/STMicroelectronics/STM32H743VIT6?qs=FNcb6ahWXRw0Me5k2ZHgWw%3D%3D
IC10 = MSI001; DESCRIPTION: Multi-mode Tuner; HEIGHT: 0.9mm; MANUFACTURER_NAME: MIRICS; MANUFACTURER_PART_NUMBER: MSI001
IC11 = MAX2650EUS+T; DESCRIPTION: MAXIM INTEGRATED PRODUCTS - MAX2650EUS+T - RF AMP, DC-1GHZ, 18.3DB, SOT-143-4; HEIGHT: mm; MANUFACTURER_NAME: Maxim Integrated; MANUFACTURER_PART_NUMBER: MAX2650EUS+T; MOUSER_PART_NUMBER: 700-MAX2650EUS+T; MOUSER_PRICE-STOCK: https://www.mouser.com/Search/Refine.aspx?Keyword=700-MAX2650EUS%2BT
IC12 IC13 = PE4259; DESCRIPTION: PART NUMBER ONLY; HEIGHT: 1.1mm; MANUFACTURER_NAME: Peregrine Semiconductor; MANUFACTURER_PART_NUMBER: PE4259; MOUSER_PART_NUMBER: N/A; MOUSER_PRICE-STOCK: https://www.mouser.co.uk/ProductDetail/pSemi/PE4259?qs=HXFqYaX1Q2z4M17diTt2%252BA%3D%3D
IC14-IC16 = PE42641MLBD-Z; DESCRIPTION: IC RF SWITCH SP4T 50 OHM 16QFN; HEIGHT: 0.8mm; MANUFACTURER_NAME: Peregrine Semiconductor; MANUFACTURER_PART_NUMBER: PE42641MLBD-Z; MOUSER_PART_NUMBER: 81-PE42641MLBD-Z; MOUSER_PRICE-STOCK: https://www.mouser.co.uk/ProductDetail/pSemi/PE42641MLBD-Z?qs=iw0hurA%2FaD2FjY5MKcciag%3D%3D
IC17 = LTC4054LES5-4.2_TRPBF; DESCRIPTION: LTC4054L-4.2 - 150mA Standalone Linear Li-Ion Battery Charger in ThinSOT; DIGI-KEY_PART_NUMBER: LTC4054LES5-4.2#TRPBFCT-ND; DIGI-KEY_PURCHASE_URL: https://www.digikey.co.id/product-detail/en/linear-technology-analog-devices/LTC4054LES5-4.2-TRPBF/LTC4054LES5-4.2-TRPBFCT-ND/1888452?utm_source=snapeda&utm_medium=aggregator&utm_campaign=symbol; MF: Linear Technology/Analog; MP: LTC4054LES5-4.2#TRPBF; PACKAGE: SOT-23-5 Linear Technology
J1 = mosquito; ARROW_PART_NUMBER: 3220-10-0300-00-TR; ARROW_PRICE-STOCK: https://www.arrow.com/en/products/3220-10-0300-00-tr/cnc-tech-llc?region=nac; DESCRIPTION: Conn Shrouded Header HDR 10 POS 1.27mm Solder ST SMD T/R; HEIGHT: 5.55mm; MANUFACTURER_NAME: CNC Tech; MANUFACTURER_PART_NUMBER: 3220-10-0300-00-TR
J2 = SamacSys_Parts; ALLIED_NUMBER: 70236843; ALLIED_PRICE-STOCK: https://www.alliedelec.com/amphenol-fci-62684-502100alf/70236843/; DESCRIPTION: FCI,Receptacle FPC/FFC 50 way FCI OPU Series 0.5mm Pitch 50 Way 1 Row Right Angle Female FPC Connector with No, Gold Flash Plated Contacts; HEIGHT: 2mm; MANUFACTURER_NAME: FCI; MANUFACTURER_PART_NUMBER: 62684-502100ALF; MOUSER_PART_NUMBER: 649-62684-502100ALF; MOUSER_PRICE-STOCK: https://www.mouser.com/Search/Refine.aspx?Keyword=649-62684-502100ALF; RS_PART_NUMBER: 8633380; RS_PRICE-STOCK: https://uk.rs-online.com/web/p/products/8633380
J3 = PRT-12639; ARROW_PART_NUMBER: PRT-12639; ARROW_PRICE-STOCK: https://www.arrow.com/en/products/prt-12639/sparkfun-electronics?region=nac; DESCRIPTION: SparkFun Accessories Audio Jack - 3.5mm TRRS (SMD); HEIGHT: 5.3mm; MANUFACTURER_NAME: SparkFun; MANUFACTURER_PART_NUMBER: PRT-12639; MOUSER_PART_NUMBER: 474-PRT-12639; MOUSER_PRICE-STOCK: https://www.mouser.co.uk/ProductDetail/SparkFun/PRT-12639?qs=WyAARYrbSnautCwYhJcFjA%3D%3D
J4 = msi0010_new; DESCRIPTION: WR-FPC 1.0mm ZIF SMT FPC connector, 20P; HEIGHT: 4mm; MANUFACTURER_NAME: Wurth Elektronik; MANUFACTURER_PART_NUMBER: 686120148922; MOUSER_PART_NUMBER: 710-686120148922; MOUSER_PRICE-STOCK: https://www.mouser.co.uk/ProductDetail/Wurth-Elektronik/686120148922?qs=a9WhcLg8qCyvYmrYQqStPQ%3D%3D
L1-L20 = Discrete
PR = snaige
Q1 = crystal
Q2 Q4 = SparkFun-DiscreteSemi; PROD_ID: TRANS-00830
Q3 = SparkFun-DiscreteSemi; PROD_ID: TRANS-08285
R1-R4 R8-R22 R24-R26 R28-R31 R33-R44 = Arduino
R5-R7 R23 R27 R32 = OLIMEX_DISCRET
USB = fifisdr
Y1 = ehl

## Nets
2C_TOUCH_SCL: R5.4.1
3.3V_A: C33.2 C97.1 C98.1 C99.1 FB3.1 FB4.1 IC7.1 IC14.2 IC15.2 IC16.2
3.3V_ON: IC6.4 IC7.3 IC9.63 R21.2
5V: C5.1 C8.1 C13.1 C16.1 C22.1 D4.C IC3.6 IC4.3 IC4.4 IC5.6 IC6.3 IC7.4 Q3.2
+3V3: C1.2 C2.2 C6.1 C9.1 C14.1 C18.2 C23.2 C30.+ C31.2 C37.2 C52.2 C67.2 C68.1 C111.1 C112.1 FB1.2 IC1.3 IC1.7 IC1.8 IC4.1 IC9.10 IC9.20 IC9.21 IC9.27 IC9.50 IC9.75 IC9.100 IC12.6 IC13.6 J1.1 J2.1 J2.13 J2.35 J2.40 J2.41 J2.42 J4.9 R3.1 R14.2 R15.1 R16.2 R25.2 R35.2 R37.2 R42.2 R43.2 R44.2 S1.2
-: IC8.25 SP1.TP
ADC_IN: C110.2 IC9.22 R40.2 R41.1
AUDIO_I_P: IC8.4 R33.2
AUDIO_IN: IC8.5 R31.2
AUDIO_Q_N: IC8.2 R30.2
AUDIO_QP: IC8.1 R29.2
B45: IC10.6 L9.1
B45_: C81.2 IC14.15
BPF1: C101.2 IC9.40 IC14.3
BPF2: C106.1 IC9.41 IC14.4
BPF3: C103.2 IC9.42 IC15.3
BPF4: C108.1 IC9.43 IC15.4
BPF5: C100.2 IC9.44 IC16.3
BPF6: C102.2 IC9.45 IC16.4
CHRG: D2.C IC9.46 IC17.1 J4.6
CPU_RST: C36.1 IC9.14 PR.1 R25.1
CPU_VBAT: C61.2 D1.C IC9.6
ENC_BUT: IC9.23 J4.1
FRAM_CS: IC1.1 IC9.51 R42.1
FRAM_MISO: IC1.2 IC9.53
FRAM_MOSI: IC1.5 IC9.54
FRAM_SCK: IC1.6 IC9.52
GND: A1.P$1 A1.P$2 BATT1.TP C1.1 C2.1 C3.2 C4.2 C5.2 C6.2 C7.2 C8.2 C10.2 C11.2 C12.1 C13.2 C14.2 C15.2 C16.2 C17.1 C18.1 C21.2 C22.2 C23.1 C24.2 C25.1 C26.1 C27.1 C28.- C29.1 C30.- C31.1 C32.2 C33.1 C34.2 C35.- C36.2 C37.1 C38.2 C39.2 C40.2 C41.2 C42.1 C43.1 C46.2 C47.2 C48.1 C49.1 C50.2 C51.2 C52.1 C53.2 C54.2 C55.2 C56.2 C57.2 C58.2 C59.1 C60.2 C61.1 C62.1 C63.1 C64.2 C65.2 C66.2 C67.1 C68.2 C69.2 C70.2 C73.2 C76.1 C82.1 C83.1 C84.2 C85.2 C88.1 C89.1 C92.1 C95.1 C97.2 C98.2 C99.2 C100.1 C101.1 C102.1 C103.1 C106.2 C107.1 C108.2 C109.1 C110.1 C111.2 C112.2 IC1.4 IC2.2 IC3.4 IC3.7 IC4.2 IC4.5 IC5.4 IC5.7 IC6.2 IC6.5 IC7.2 IC7.5 IC8.12 IC8.24 IC8.28 IC8.33 IC9.11 IC9.19 IC9.26 IC9.49 IC9.74 IC9.99 IC10.41 IC11.2 IC12.2 IC13.2 IC14.1 IC14.5 IC14.7 IC14.9 IC14.10 IC14.12 IC14.14 IC14.17 IC15.1 IC15.5 IC15.7 IC15.9 IC15.10 IC15.12 IC15.14 IC15.17 IC16.1 IC16.5 IC16.7 IC16.9 IC16.10 IC16.12 IC16.14 IC16.17 IC17.2 J1.10 J2.11 J2.12 J2.14 J2.15 J2.16 J2.17 J2.18 J2.19 J2.20 J2.21 J2.22 J2.23 J2.24 J2.25 J2.26 J2.27 J2.28 J2.29 J2.30 J2.31 J2.32 J2.43 J2.48 J2.49 J2.50 J2.51 J2.52 J3.1 J4.10 J4.MP1 J4.MP2 L5.1 L6.2 L12.1 L16.1 PR.5 Q1.2 Q2.2 Q4.2 R2.2 R4.2 R8.2 R11.1 R12.2 R13.2 R18.2 R19.2 R21.1 R24.2 R36.2 R39.2 R41.2 USB.5 USB.M1 USB.M2 USB.M3 USB.M4
I2C_TOUCH_IRQ: IC9.65 R5.2.1
I2C_TOUCH_RST: IC9.64 R5.1.1
I2C_TOUCH_SCL: IC9.67
I2C_TOUCH_SDA: IC9.66 R5.3.1
IO15: C48.2 IC9.8 Y1.P$2
IO16: C49.2 IC9.9 Y1.P$1
LBAND_: C79.2 IC14.8
LBAND_N: C77.1 IC10.25 L8.1
LBAND_P: C84.1 IC10.24 L8.2 L11.2
LCD_CS: J2.38 R7.1.2
LCD_DC: J2.37 R7.2.2
LCD_MISO: J2.33 R6.1.2
LCD_MOSI: J2.34 R7.4.2
LCD_RST: J2.10 R6.2.2
LCD_SCK: J2.36 R7.3.2
LCD_TOUCH_IRQ: J2.46 R5.2.2
LCD_TOUCH_RST: J2.47 R5.1.2
LCD_TOUCH_SCL: J2.44 R5.4.2 R44.1
LCD_TOUCH_SDA: J2.45 R5.3.2 R43.1
N$1: C34.1 IC10.40
N$2: C96.1 IC10.39
N$3: C39.1 FB3.2 IC10.31 IC10.32
N$4: C71.1 IC13.1
N$5: C32.1 C35.+ C41.1 C43.2 C46.1 C47.1 C50.1 C51.1 C62.2 C63.2 FB4.2 IC10.1 IC10.2 IC10.8 IC10.14 IC10.15 IC10.18 IC10.19 IC10.23 IC10.29 IC10.30 IC10.36
N$6: C64.1 IC10.12 R31.1
N$7: C65.1 IC10.11 R33.1
N$8: C60.1 IC10.21 R30.1
N$9: C59.2 IC10.22 R29.1
N$10: C82.2 L9.2 L10.1
N$11: C21.1 IC5.3
N$12: C78.2 C79.1 C85.1 L7.1 L11.1
N$13: C80.1 L10.2
N$14: C77.2 C78.1 L6.1
N$15: C83.2 L7.2
N$16: C80.2 C81.1 L12.2
N$17: C10.1 FB1.1 Q1.4
N$18: C76.2 L3.2 L4.1
N$19: C74.1 L4.2
N$20: C74.2 C75.1 L5.2
N$21: IC14.11 IC15.8
N$22: C86.1 L13.2
N$23: C86.2 C89.2 L14.2 L16.2
N$24: C87.2 C88.2 L14.1
N$25: C90.1 IC15.15 L15.2
N$26: C42.2 IC10.4
N$27: C58.1 IC10.9
N$28: C57.1 IC10.7
N$29: IC10.33 R23.2.2
N$30: IC10.34 R23.3.2
N$31: IC10.35 R23.4.2
N$32: C40.1 C44.2 IC10.28 R26.1
N$33: C44.1 C45.2 IC10.27
N$34: C45.1 IC10.26 R26.2
N$35: C90.2 C91.1 C92.2 L15.1
N$36: C72.1 IC11.1
N$37: C91.2 IC16.15
N$38: C104.1 C107.2 L19.2 L20.1
N$39: C104.2 C105.1 L19.1
N$40: IC15.6 L20.2
N$41: C105.2 IC16.6
N$42: C93.1 C95.2 L17.2 L18.1
N$43: C93.2 C94.1 L17.1
N$44: IC15.13 L18.2
N$45: C94.2 IC16.13
N$46: C19.+ IC8.30
N$47: IC10.20 R23.1.2
N$48: C24.1 IC8.27
N$49: C25.2 C26.2 C27.2 FB2.2 IC6.1 IC8.31
N$50: C53.1 C54.1 FB5.2 IC8.13
N$51: FB2.1 FB5.1 FB6.2
N$52: C55.1 C56.1 FB6.1 IC8.14 R28.1
N$53: IC8.18 R28.2
N$54: C20.+ IC8.29
N$55: IC8.7 R27.1.2
N$56: IC8.8 R27.2.2
N$57: IC8.9 R27.3.2
N$58: IC8.10 R27.4.2
N$59: C7.1 IC3.3
N$60: IC5.2 R18.1
N$61: IC8.15 R32.2.1
N$62: IC8.11 R32.1.1
N$63: IC8.16 R32.3.1
N$64: IC8.17 R32.4.1
N$65: C19.- L1.1
N$66: C20.- L2.1
N$67: C12.2 J3.2 L2.2 R12.1
N$68: IC3.2 R8.1
N$69: C11.1 J3.3 L1.2 R11.2
N$70: IC2.6 USB.3
N$72: C71.2 IC11.3
N$73: J2.2 J2.3 R17.2
N$74: IC17.5 R36.1
N$75: C72.2 IC12.1
N$76: D2.A R35.1
N$77: A1.P$3 IC12.5
N$78: J2.7 R16.1
N$79: C17.2 Q2.3 R17.1
N$80: Q2.1 R19.1 R20.2
N$81: J2.9 R14.1
N$82: J2.8 R15.2
N$83: D3.C Q4.3
N$84: C66.1 IC9.48
N$85: C38.1 IC9.73
N$86: C96.2 IC16.11
N$87: IC8.23 SP.TP
N$89: Q4.1 R38.2
N$90: IC2.4 USB.2
N$91: R22.2 R24.1 S1.1
N$92: IC9.94 R22.1
N$93: C9.2 R9.1
N$94: IC12.3 IC13.3
OTG_FS_D_N: IC2.1 IC9.70
OTG_FS_D_P: IC2.3 IC9.71
OTG_FS_ID: IC9.69 USB.4
OTG_FS_VBUS: IC9.68 R1.2 R2.1
PD8: IC9.55 J1.3
PD9: IC9.56 J1.2
PD10: IC9.57 J1.6
PD11: IC9.58 J1.8
PD12: IC9.59
PD13: IC9.60 J1.9
PD14: IC9.61
PD15: IC9.62 J1.7
PREAMP: C4.1 C69.1 IC3.1 IC11.4
PREAMP1: C70.1 C73.1 IC3.5 IC9.97 IC12.4 IC13.4
PWR: J4.8 R9.2 R10.1 R13.1
REF_CLK_MSI001: CLK.TP IC9.12 Q1.3 R23.1.1
RENC1_A: IC9.15 J4.3
RENC1_B: IC9.16 J4.2
RENC2_A: IC9.17 J4.5
RENC2_B: IC9.18 J4.4
RF_IN: IC13.5 IC15.11
SAI1_CODEC_ADC_DATA: IC9.2 R27.3.1
SAI1_CODEC_BCLK: IC9.4 R27.2.1
SAI1_CODEC_DAC_DATA: IC9.5 R27.4.1
SAI1_CODEC_FS: IC9.3 R27.1.1
SAI1_CODEC_MCLK: IC9.1 R32.1.2
SPI2_MSI_CS: IC9.28 R23.2.1
SPI2_MSI_MOSI: IC9.31 R23.4.1
SPI2_MSI_SCK: IC9.29 R23.3.1
SPI6_CODEC_CS: IC9.92 R32.2.2
SPI6_CODEC_MOSI: IC9.91 R32.4.2
SPI6_CODEC_SCK: IC9.89 R32.3.2
SPI_LCD_BL: IC9.95 R20.1
SPI_LCD_CS: IC9.77 R7.1.1
SPI_LCD_DC: IC9.81 R7.2.1
SPI_LCD_MISO: IC9.79 R6.1.1
SPI_LCD_MOSI: IC9.80 R7.4.1
SPI_LCD_RST: IC9.82 R6.2.1
SPI_LCD_SCK: IC9.78 R7.3.1
STBY: D3.A IC9.47 J4.7 R37.1
SW_CLK: IC9.76 PR.4 R3.2
SWD_IO: IC9.72 PR.3 R4.1
V_BATT: BATT.TP IC17.3 Q3.3 R34.1 R40.1
VBUS: C3.1 C109.2 D4.A IC2.5 IC17.4 Q3.1 R1.1 R38.1 R39.1 USB.1
VBUS1: D1.A R34.2
VHF1: IC10.10 L3.1
VHF1_: C75.2 IC14.13
VHF2: IC10.3 L13.1
VHF2_: C87.1 IC14.6
VSKP_CODEC: C15.1 C28.+ C29.2 IC5.1 IC8.26
VSPK_ON: IC5.5 IC9.98
WAKEUP: IC9.7 R10.2